# Altium PCB Gate dricer_pcb_lib.PcbDoc
Units mil, origin at the board's own origin, x right, y up, seen from the top; angles counter-clockwise.
Board outline 6000 x 4000 mil, 2 copper layers (Top Layer, Bottom Layer); 20 components, 14 nets, 66 pads, 0 vias.
Unrouted connection lines stored in the file: 48.
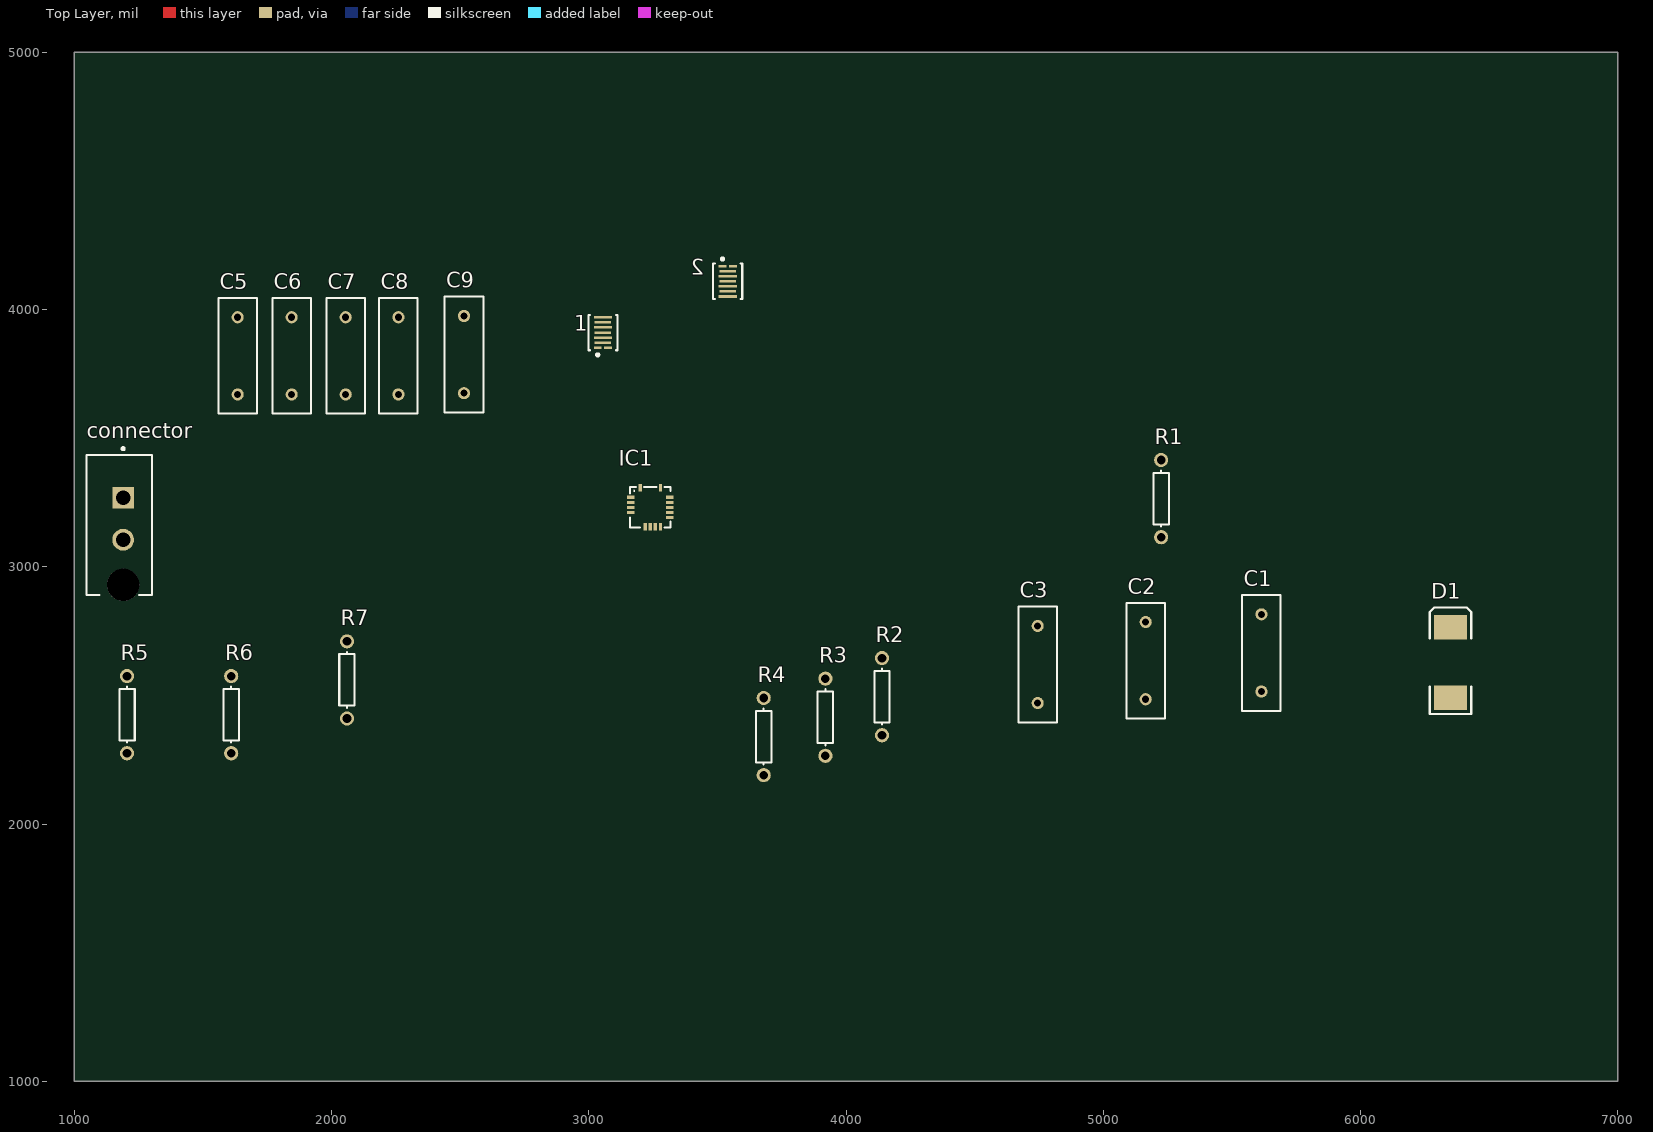
[diagram p0: Top Layer view]
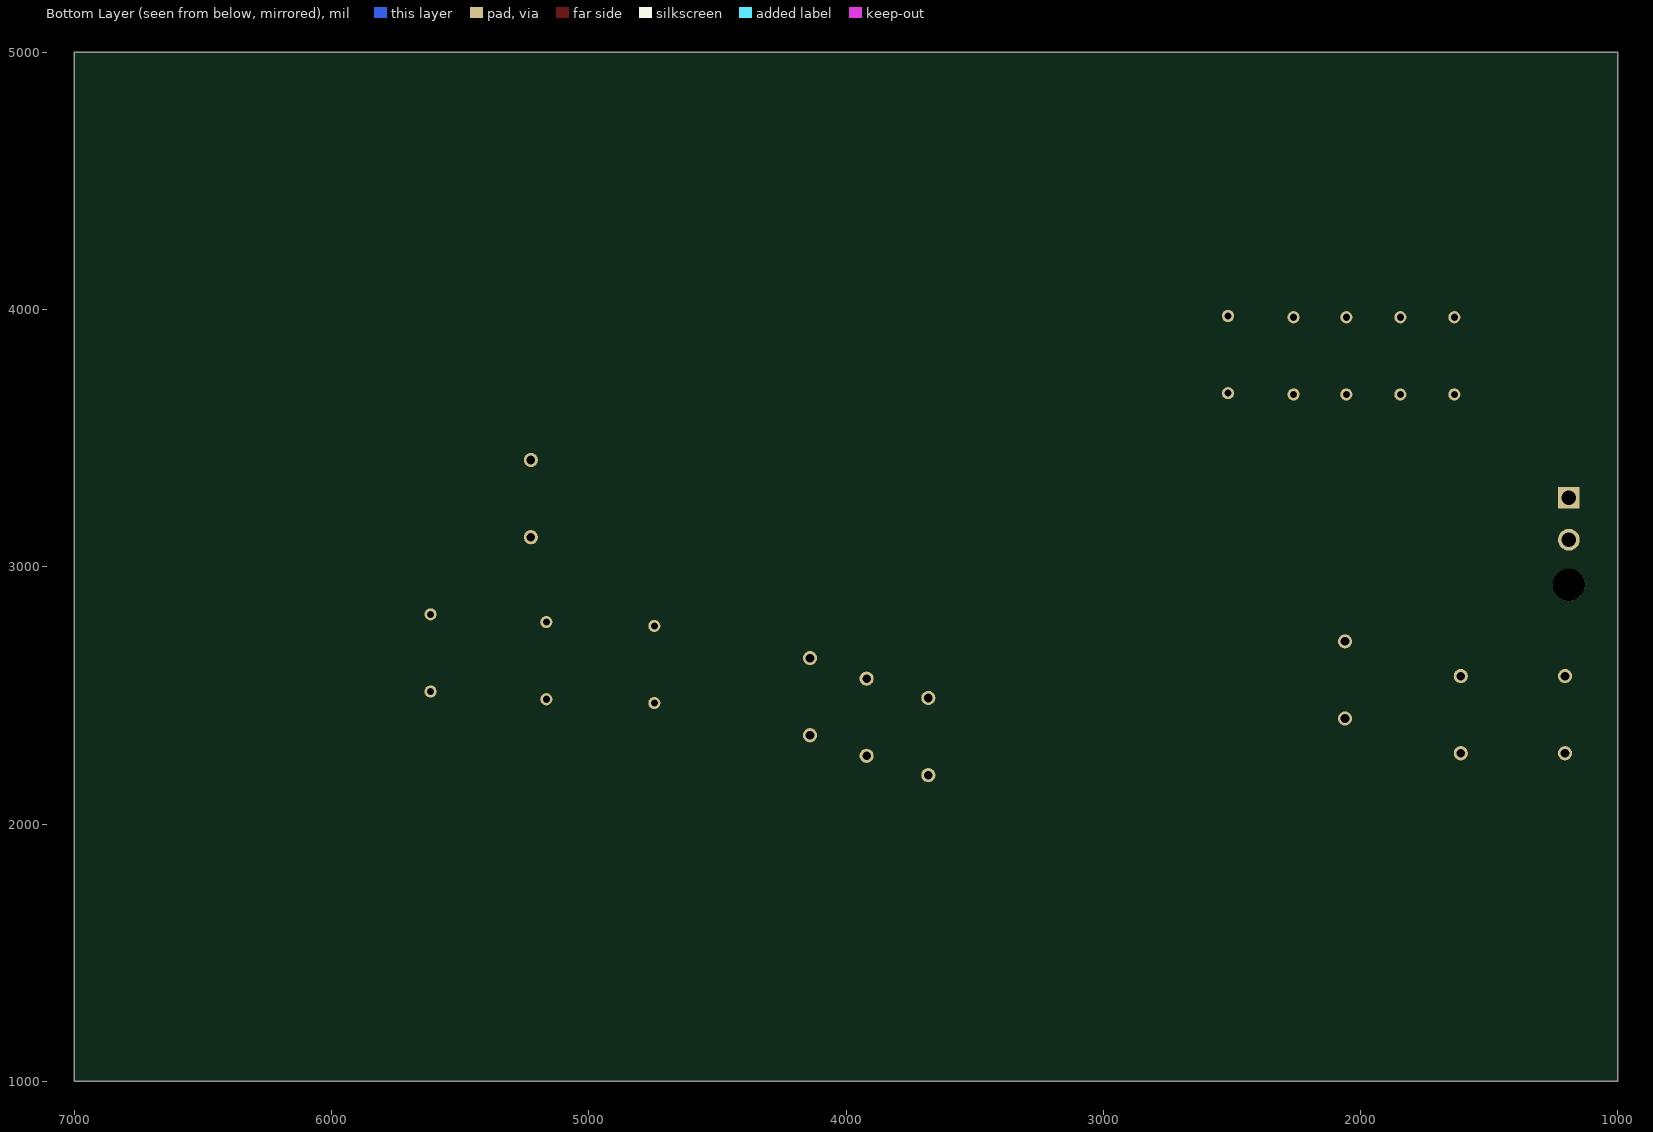
[diagram p1: Bottom Layer view, seen from below]

## Layer stack, top to bottom
Top Solder: solder mask 0.4, Solder Resist, Dk 3.5
Top Layer: signal copper 1.4
Dielectric 1: dielectric 12.6, FR-4, Dk 4.8
Bottom Layer: signal copper 1.4
Bottom Solder: solder mask 0.4, Solder Resist, Dk 3.5

## Board outline
1000,1000 7000,1000 7000,5000 1000,5000

## Design rules (kind name [scope] priority, off if disabled: settings)
Clearance [All] p1: gap=10 ignorepadtopadclearanceinfootprint=FALSE
PolygonConnect [All] p1: connectstyle=Relief reliefconductorwidth=10 reliefentries=4 polygonreliefangle="90 Angle" airgapwidth=10
RoutingVias [All] p1: holewidth=28 width=50 viastyle="Through Hole" minholewidth=28 minwidth=50 maxholewidth=28 maxwidth=50
SolderMaskExpansion [All] p1: expansion=4 istentingtop=FALSE
SupplyNets "Schematic Supply Nets" [InNet('GND')] p1: voltage=0.000
Width [All] p1: maxlimit=10 minlimit=10 preferedwidth=10
30 further rules are at their usual default settings.

## Components (designator, comment, footprint, x,y, rotation, side; value= is the part's Value field where it differs from the comment)
1 "GAN3R2-100CBE" FP-WLCSP8-SOT8072-MFG#1 3055,3910.63 r90 top
2 "GAN3R2-100CBE" FP-WLCSP8-SOT8072-MFG#2 3540,4109.69 r270 top
C1 "Cap" RAD-0.3 5615,2665 r90 top value=100pF
C2 "Cap" RAD-0.3 5165,2635 r90 top value=100pF
C3 "Cap" RAD-0.3 4745,2620 r90 top value=100pF
C5 "Cap" RAD-0.3 1635,3820 r90 top value=40pF
C6 "Cap" RAD-0.3 1845,3820 r90 top value=30u
C7 "Cap" RAD-0.3 2055,3820 r90 top value=10u
C8 "Cap" RAD-0.3 2260,3820 r90 top value=1u
C9 "Cap" RAD-0.3 2515,3825 r90 top value=100pF
connector "1-770166-1" FP-1-770166-1-MFG 1174.84,3161.69 r270 top
D1 "Diode" SMC 6350,2628.19 r90 top
IC1 "NCP51820" NCP51820 3239.21,3230.63 r0 top
R1 "Res1" AXIAL-0.3 5225,3265 r90 top value=1K
R2 "Res1" AXIAL-0.3 4140,2495 r90 top value=1K
R3 "Res1" AXIAL-0.3 3920,2415 r90 top value=1K
R4 "Res1" AXIAL-0.3 3680,2340 r90 top value=1K
R5 "Res1" AXIAL-0.3 1205,2425 r90 top value=1K
R6 "Res1" AXIAL-0.3 1610,2425 r90 top value=1K
R7 "Res1" AXIAL-0.3 2060,2560 r90 top value=1K

## Footprints (in the part's own frame and the unit in brackets; to place one, negate y for a bottom-side part, rotate by r counter-clockwise, add the part's x,y. Pads: shape width x height; smd on the part's side, far side on the other; paste and mask are expansions set on the pad)
AXIAL-0.3 [mm] "Axial Device, Thru-Hole; 2 Leads; 0.3 in Pin Spacing"
  round 1.4 hole 0.85: 1(-3.81,0) 2(3.81,0)
  silkscreen extent -2.77,-0.76 2.77,0.76
FP-1-770166-1-MFG [mm]
  rect 2.15x2.15 hole 1.4 paste-2539.97 mask+0: 1(-2.7,0.385)
  round 2.15 hole 1.4 paste-2539.97 mask+0: 2(1.44,0.385)
  round 3.18 hole 3.18 unplated paste-2539.97 mask+0: ""(5.89,0.385)
  silkscreen extent -7.67,-3.24 6.91,3.24, body extent -7.01,-3.34 7.58,3.34, height 0.25
FP-WLCSP8-SOT8072-MFG#1 [mm]
  rect 0.25x0.77 smd paste-1000 mask+0: 1(-1.5,0.512) 2(-1.5,-0.513)
  rect 0.25x1.62 smd paste-1000 mask+0: 3(-1,0) 5(0,0) 7(1,0)
  rect 0.25x1.8 smd paste-1000 mask+0: 4(-0.5,0) 6(0.5,0) 8(1.5,0)
  silkscreen extent -2.32,-1.44 1.75,1.44, body extent -1.85,-1.17 1.85,1.17, height 0.25
FP-WLCSP8-SOT8072-MFG#2 [mm]
  rect 0.25x0.77 smd paste-1000 mask+0: 1(-1.5,-0.512) 2(-1.5,0.513)
  rect 0.25x1.62 smd paste-1000 mask+0: 3(-1,0) 5(0,0) 7(1,0)
  rect 0.25x1.8 smd paste-1000 mask+0: 4(-0.5,0) 6(0.5,0) 8(1.5,0)
  silkscreen extent -2.32,-1.44 1.75,1.44, body extent -1.75,-1.06 1.75,1.06, height 0.47
NCP51820 [mm]
  rect 0.75x0.32 smd: 1(-1.925,1) 2(-1.925,0.5) 3(-1.925,0) 4(-1.925,-0.5) 9(1.925,-1) 10(1.925,-0.5) 11(1.925,0) 12(1.925,0.5) 13(1.925,1)
  rect 0.32x0.75 smd: 5(-0.5,-1.925) 6(0,-1.925) 7(0.5,-1.925) 8(1,-1.925) 14(1,1.925) 15(-1,1.925)
  silkscreen extent -2,-2 2,2, body extent -1.84,-2.14 2.2,1.9, height 0.89
RAD-0.3 [mm] "Radial Cap, Thru-Hole; 2 Leads; 0.3 in Pin Spacing"
  round 1.2 hole 0.7: 1(-3.81,0) 2(3.81,0)
  silkscreen extent -5.71,-1.91 5.71,1.91
SMC [mm] "DO-214-AB/SMC; 2 C-Bend Leads; Body 7.9 x 5.9 mm, inc. leads (LxW)"
  rect 2.4x3.3 smd: 1(-3.475,0) 2(3.475,0)
  silkscreen extent -5.07,-2.05 5.43,2.05

## Part data
1 2: library part GAN3R2-100CBE_1, "GAN3R2-100CBE                                                                                                                                                                                                                                                     100 V, 3.2 mOhm Gallium Nitride (GaN) FET in a 3.5 mm x 2.13 mm Wafer Level Chip", Continuous Drain Current (ID)=60A, Drain to Source Breakdown Voltage=100V, Drain to Source Resistance=2.4mΩ, Gate to Source Voltage (Vgs)=-4V, Max Junction Temperature (Tj)=150°C, Min Operating Temperature=-40°C, Power Dissipation=394W, Drain to Source Voltage (Vdss)=100V, Height=464µm, Max Operating Temperature=150°C, MPN=GAN3R2-100CBE, NexarPartId=136220986, Number of Channels=1
C1 C2 C3 C5 C6 C7 C8 C9: "Capacitor", LatestRevisionDate=17-Jul-2002, LatestRevisionNote="Re-released for DXP Platform.", PackageDescription="Radial Cap, Thru-Hole; 2 Leads; 0.3 in Pin Spacing", PackageReference=RAD-0.3, Published=8-Jun-2000, Publisher="Altium Limited"
connector: library part CMP-03369-000027-1, "CONN HEADER VERT 2POS 4.14MM", Current Rating=9.5A, Manufacturer="TE Connectivity", Temperature="-55°C to +105°C", Temperature Range High=+105°C, Temperature Range Low=-55°C, Voltage Rating=600V, Automotive=No, Category=Conn, ComponentLink2Description=Datasheet, ComponentLink2URL=https://www.te.com/commerce/DocumentDelivery/DDEController?Action=showdoc&DocId=Customer+Drawing%7F770166%7FM%7Fpdf%7FEnglish%7FENG_CD_770166_M.pdf%7F1-770166-1, Conn Gender=Male, Conn Orientation=Vertical, Contact Material=Gold,Nickel, Device Class L1=Connectors, Device Class L2="Headers and Wire Housings", Device Class L3=unset, Digikey Description="CONN HEADER VERT 2POS 4.14MM", Height=14.51mm, Is Female=yes, Lead Free=Yes, Manufacturer Part Number=1-770166-1, Mouser Description="Mini-Universal MATE-N-LOK 2 Position Single Row Through-Hole Straight Pin Header", Number Of Contacts=2, Number Of Rows=1, Octopart=https://octopart.com/1-770166-1-te+connectivity-46507887, Package=1-770166-1, Pitch=4.14mm, RoHS=TRUE, Standoff Height=0.63mm
D1: "Default Diode", Code_JEDEC=DO-214-AB, LatestRevisionDate=17-Jul-2002, LatestRevisionNote="Re-released for DXP Platform.", PackageDescription="DO-214-AB/SMC; 2 C-Bend Leads; Body 7.9 x 5.9 mm, inc. leads (LxW)", PackageReference=SMC, PackageVersion=Sep-1996, Published=8-Jun-2000, Publisher="Altium Limited"
IC1: "Integrated Circuit", Manufacturer_Name=onsemi, Mouser Part Number=N/A, Datasheet Link=https://www.onsemi.com/download/data-sheet/pdf/ncp51820-d.pdf, Height=0.9mm, Manufacturer_Part_Number=NCP51820, Mouser Price/Stock=https://www.mouser.co.uk/ProductDetail/onsemi/NCP51820?qs=vEM7xhTegWhaPMdkL3AwCA%3D%3D
R1 R2 R3 R4 R5 R6 R7: "Resistor", LatestRevisionDate=17-Jul-2002, LatestRevisionNote="Re-released for DXP Platform.", PackageDescription="Axial Device, Thru-Hole; 2 Leads; 0.3 in Pin Spacing", PackageReference=AXIAL-0.3, Published=8-Jun-2000, Publisher="Altium Limited"

## Nets (pads, with @x,y where several pads share a name; then routed paths per layer and width w, separated by ;. In a path a pad name is that pad's centre, name@x,y a point inside that pad or via, vN(x,y) a via of type N, cw(c..) or ccw(c..) an arc to the next point about the centre after c; other vN are vias at no path point)
GND: 2.2 2.4 2.6 2.8 C2.1 C5.1 C6.1 C7.1 C8.1 C9.1 connector.2 IC1.6 IC1.8 IC1.10 R5.2 R6.2
Net1_1: 1.1 R3.1 R4.1
Net1_2: 1.2 1.4 1.6 1.8 2.3 2.5 2.7 IC1.4
Net1_3: 1.3 1.5 1.7 C5.2 C6.2 C8.2 connector.1
Net2_1: 2.1 R6.1 R7.1
NetC1_1: C1.1 C3.1 IC1.2 R3.2
NetC1_2: C1.2 D1.1 D1.2 IC1.15 R1.1
NetC2_2: C2.2 IC1.14 R1.2 R2.2
NetC3_2: C3.2 IC1.1
NetC9_2: C9.2 IC1.5
NetIC1_3: IC1.3 R4.2
NetIC1_7: IC1.7 R7.2
NetIC1_9: IC1.9 R5.1
NetIC1_13: IC1.13 R2.1
pads on no net: C7.2 connector. IC1.11 IC1.12